# Altium PCB P1_SELF_GD303 V1.1.PcbDoc (part 1 of 2)
Units mm, origin at the board's own origin, x right, y up, seen from the top; angles counter-clockwise.
Board outline 113.1 x 59.11 mm, 2 copper layers (Top layer, Bottom layer), stack 1.171 mm thick; 160 components, 103 nets, 482 pads, 705 vias.
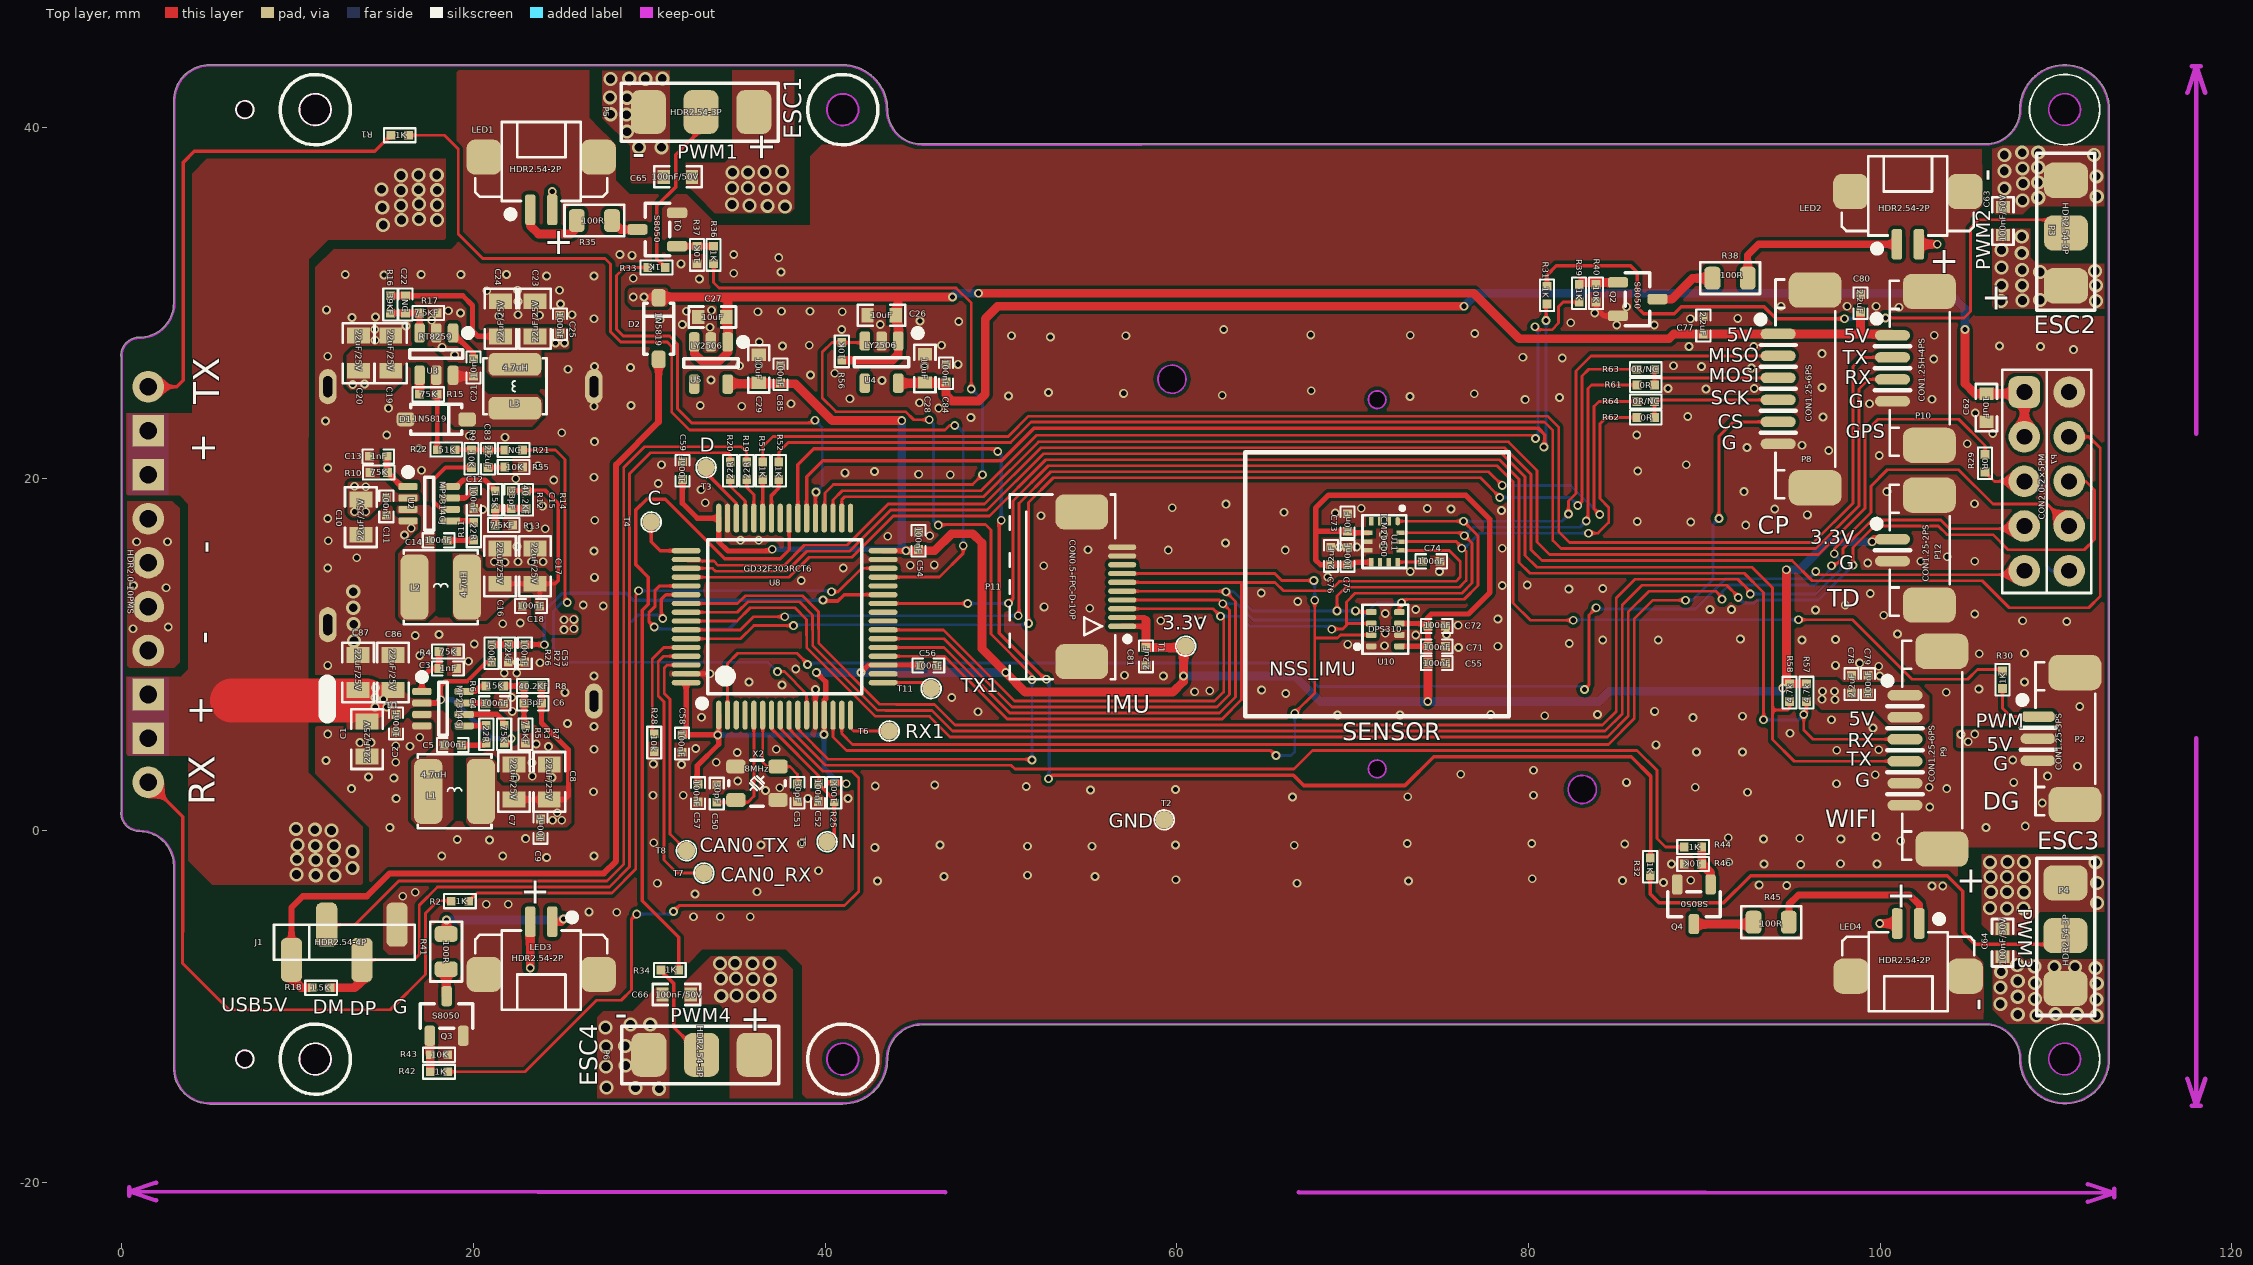
[diagram p0: Top layer view]
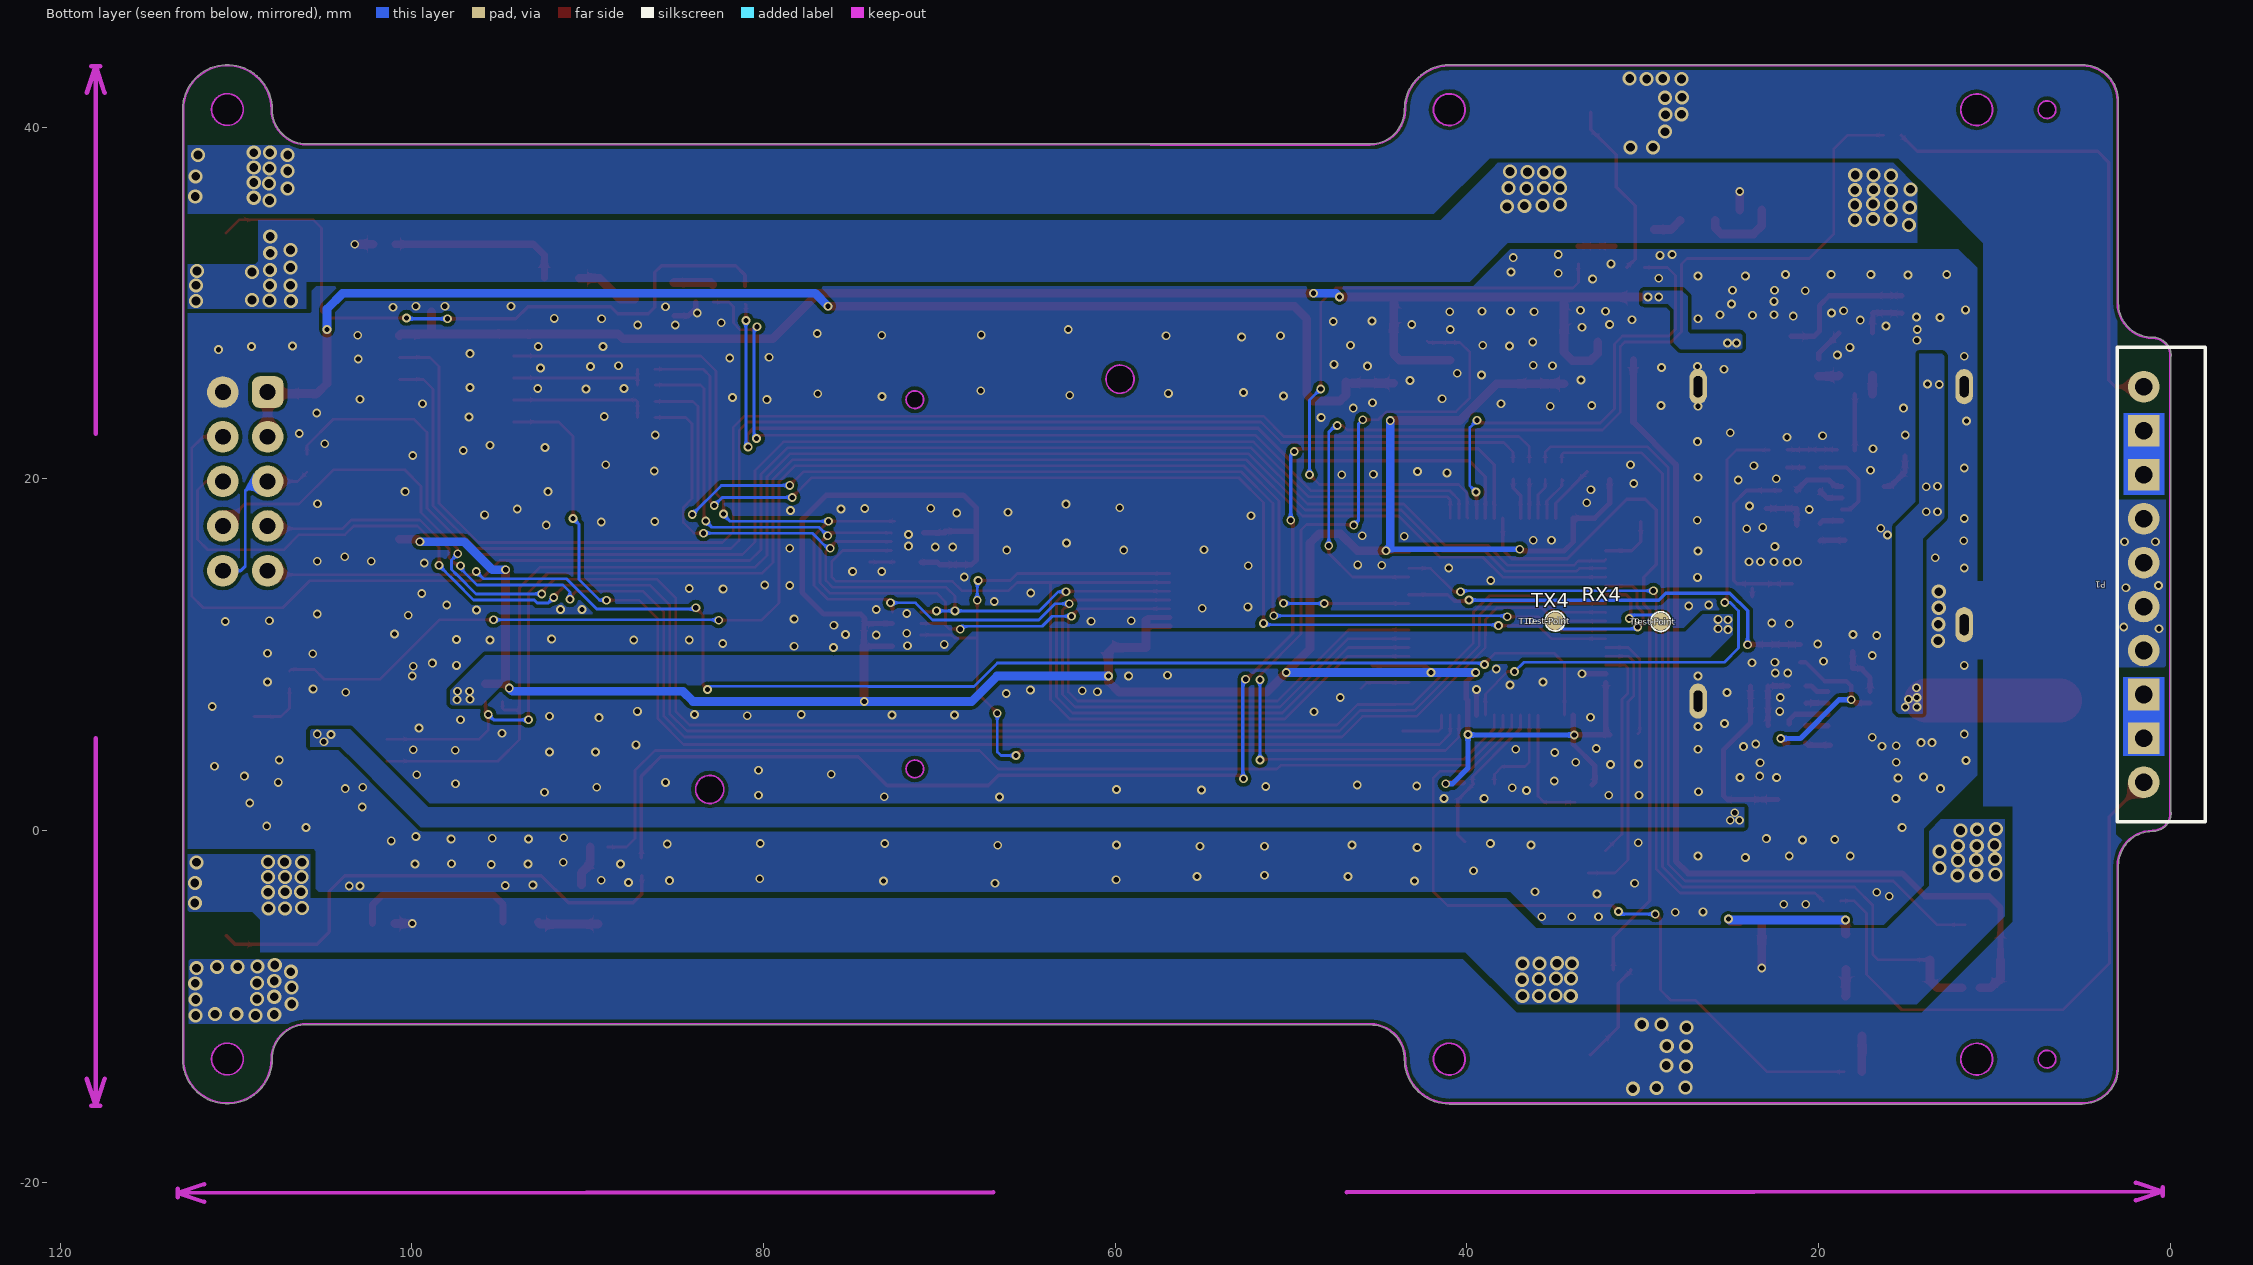
[diagram p1: Bottom layer view, seen from below]

## Layer stack, top to bottom
Top Solder: solder mask 0.0102, Solder Resist, Dk 3.5
Top layer: signal copper 0.0356
Dielectric 1: core 1.1, FR-4, Dk 4.2
Bottom layer: signal copper 0.0356
Bottom Solder: solder mask 0.0102, Solder Resist, Dk 3.5

## Board outline
2.94,-13.491 cw(c2.991,-13.491) 2.95,-13.461 2.95,-2.02 cw(c2.991,-1.991) 2.94,-1.991 ccw(c0.991,-1.991) 2.355,-0.598 ccw(c1,-2) 1,-0.05 cw(c1,1) 0.263,0.252 cw(c0.991,1.009) -0.06,1.009 cw(c-0.009,1.009) -0.05,1.039 -0.05,26.98 cw(c-0.009,27.009) -0.06,27.009 cw(c0.991,27.009) 0.991,28.06 ccw(c0.991,30.009) 2.94,30.009 cw(c2.991,30.009) 2.95,30.039 2.95,41.48 cw(c2.991,41.509) 2.94,41.509 cw(c4.991,41.509) 4.991,43.56 cw(c4.991,43.509) 5.02,43.55 40.961,43.55 cw(c40.991,43.509) 40.991,43.56 cw(c40.991,41.009) 42.774,42.832 cw(c41,41) 43.55,41 ccw(c45.5,41) 45.462,39.051 cw(c45.491,39.009) 45.491,39.06 105.991,39.06 ccw(c105.991,41.009) 107.94,41.009 cw(c107.991,41.009) 107.94,41.009 cw(c110.491,41.009) 113.041,41.009 113.041,-12.991 cw(c110.491,-12.991) 107.94,-12.991 cw(c107.991,-12.991) 107.94,-12.99 cw(c105.991,-12.991) 107.94,-12.991 107.94,-12.99 ccw(c105.991,-12.991) 105.991,-11.041 45.529,-11.041 cw(c45.5,-11) 45.5,-11.05 ccw(c45.5,-13) 43.55,-13 cw(c41,-13) 41,-15.55 5,-15.55 cw(c5,-15.5) 4.999,-15.55 cw(c5,-13.5) 3.565,-14.965 cw(c4.991,-13.491)
cut-out: 59.723,24.876 cw(c59.723,25.676) 58.923,25.676 cw(c59.723,25.676) 59.723,26.476 cw(c59.723,25.676) 60.523,25.676 cw(c59.723,25.676)
cut-out: 70.891,24.509 ccw(c71.391,24.509) 71.391,24.009 ccw(c71.391,24.509) 71.891,24.509 ccw(c71.391,24.509) 71.391,25.009 ccw(c71.391,24.509)
cut-out: 70.891,3.509 ccw(c71.391,3.509) 71.391,3.009 ccw(c71.391,3.509) 71.891,3.509 ccw(c71.391,3.509) 71.391,4.009 ccw(c71.391,3.509)
cut-out: 82.258,2.342 ccw(c83.058,2.342) 83.058,1.542 ccw(c83.058,2.342) 83.858,2.342 ccw(c83.058,2.342) 83.058,3.142 ccw(c83.058,2.342)
cut-out: 109.591,41.009 ccw(c110.491,41.009) 110.491,40.109 ccw(c110.491,41.009) 111.391,41.009 ccw(c110.491,41.009) 110.491,41.909 ccw(c110.491,41.009)
cut-out: 109.591,-12.991 ccw(c110.491,-12.991) 110.491,-13.891 ccw(c110.491,-12.991) 111.391,-12.991 ccw(c110.491,-12.991) 110.491,-12.091 ccw(c110.491,-12.991)
cut-out: 7,40.5 cw(c7,41) 6.5,41 cw(c7,41) 7,41.5 cw(c7,41) 7.5,41 cw(c7,41)
cut-out: 11,40.1 cw(c11,41) 10.1,41 cw(c11,41) 11,41.9 cw(c11,41) 11.9,41 cw(c11,41)
cut-out: 41,40.1 cw(c41,41) 40.1,41 cw(c41,41) 41,41.9 cw(c41,41) 41.9,41 cw(c41,41)
cut-out: 7,-13.5 cw(c7,-13) 6.5,-13 cw(c7,-13) 7,-12.5 cw(c7,-13) 7.5,-13 cw(c7,-13)
cut-out: 11,-13.9 cw(c11,-13) 10.1,-13 cw(c11,-13) 11,-12.1 cw(c11,-13) 11.9,-13 cw(c11,-13)
cut-out: 40.1,-13 ccw(c41,-13) 41,-13.9 ccw(c41,-13) 41.9,-13 ccw(c41,-13) 41,-12.1 ccw(c41,-13)

## Design rules (kind name [scope] priority, off if disabled: settings)
Clearance [InPolygon] p1: gap=0.2
Clearance Clearance_1 [All] p2: gap=0.18
ComponentClearance [All] p1 off: gap=0.254 collisioncheckmode=3 verticalgap=0.254 showdistances=FALSE
DiffPairsRouting [All] p1: maxlimit=0.3 minlimit=0.3 mostfreqgap=0.3 toplayer_minwidth=0.2 toplayer_maxwidth=0.2 toplayer_prefwidth=0.2 bottomlayer_minwidth=0.2 bottomlayer_maxwidth=0.2 bottomlayer_prefwidth=0.2 maxuncoupledlength=12.7
FabricationTestPointUsage FabricationTestPointUsage_1 [All] p1: valid=0 allowmultiple=FALSE
FabricationTestpoint FabricationTestpoint_1 [All] p1: side=3 testpointundercomponent=TRUE minsize=1.016 maxsize=2.54 preferedsize=1.524 minholesize=0 maxholesize=1.016 preferedholesize=0.813 testpointgrid=0.025 allowsidetop=TRUE allowsidebottom=TRUE usegrid=TRUE gridtolerance=0
Height [All] p1 off: minheight=0 maxheight=25.4 prefheight=12.7
HoleSize [All] p1 off: absolutevalues=TRUE maxlimit=2.54 minlimit=0.025 maxpercent=80.000 minpercent=20.000
HoleSize FabricationTestpoint [(IsPad And (OnTopLayer Or OnBottomLayer))] p2 off: absolutevalues=TRUE maxlimit=2.54 minlimit=0.025 maxpercent=80.000 minpercent=20.000
HoleSize FabricationTestPointUsage [All] p3 off: absolutevalues=TRUE maxlimit=2.54 minlimit=0.025 maxpercent=80.000 minpercent=20.000
HoleToHoleClearance [All] p1 off: gap=0.254 allowstackedmicrovias=TRUE
LayerPairs [All] p1 off: enforce=TRUE
MinimumSolderMaskSliver [All] p1 off: minsoldermaskwidth=0.254
MinimumSolderMaskSliver SilkToSolderMaskClearance [IsPad] p2 off: minsoldermaskwidth=0.254
NetAntennae [All] p1 off: netantennaetolerance=0
PasteMaskExpansion [All] p1 off: expansion=0
PlaneClearance [All] p1 off: clearance=0.356
PlaneConnect [All] p1: planeconnectstyle=Direct reliefexpansion=0.5 reliefentries=4 reliefconductorwidth=0.4 reliefairgap=0.4
PolygonConnect [All] p1: connectstyle=Direct reliefconductorwidth=0.254 reliefentries=4 polygonreliefangle="90 Angle" airgapwidth=0.254
RoutingCorners [All] p1 off: cornerstyle=45-Degree minsetback=2.54 maxsetback=2.54
RoutingLayers [All] p1 off: top layer_v5=TRUE bottom layer_v5=TRUE
RoutingPriority [All] p1 off: routingpriority=0
RoutingTopology [All] p1 off: topology=Shortest
RoutingVias "R_All Differential Pairs" [(InDifferentialPairClass('All Differential Pairs'))] p1: holewidth=0.25 width=0.4 viastyle="Through Hole" minholewidth=0.25 minwidth=0.4 maxholewidth=0.25 maxwidth=0.4
RoutingVias R_All [All] p2: holewidth=0.25 width=0.4 viastyle="Through Hole" minholewidth=0.25 minwidth=0.4 maxholewidth=0.25 maxwidth=0.4
SilkToSilkClearance [All] p1 off: silktosilkclearance=0.254
SilkToSolderMaskClearance SilkToSolderMaskClearance_1 [IsPad] p1: minsilkscreentomaskgap=0.254 clearancetoexposedcopper=TRUE
SolderMaskExpansion [All] p1 off: expansion=0.102
Width "W_All Differential Pairs" [(InDifferentialPairClass('All Differential Pairs'))] p1: maxlimit=0.2 minlimit=0.1 preferedwidth=0.2 minimp=50.000000 maximp=50.000000 favimp=50.000000
Width W_All [All] p2: maxlimit=2 minlimit=0.1 preferedwidth=0.16 minimp=50.000000 maximp=50.000000 favimp=50.000000
11 further rules are at their usual default settings.

## Classes and differential pairs
component class "P1-SELF IMU+CP+AIR  V1.1": C71 C72 C73 C74 C75 C76 C77 C78 C79 C80 C81 P8 P9 P10 P11 R51 R52 R57 R58 R61 R62 R63 R64 U10 U11
component class "P1_SELF MCU+2.4G V1.1": C50 C51 C52 C53 C54 C55 C56 C57 C58 C59 C62 C63 C64 C65 C66 LED1 LED2 LED3 LED4 P2 P3 P4 P5 P6 P7 Q1 Q2 Q3 Q4 R25 R26 R27 R28 R29 R30 R31 R32 R33 R34 R35 R36 R37 R38 R39 R40 R41 R42 R43 R44 R45 R46 T1 T2 T3 T4 T5 T6 T7 T8 T9 T10 T11 U8 X2
component class "P1_SELF POWER  V1.1": C1 C2 C3 C4 C5 C6 C7 C8 C9 C10 C11 C12 C13 C14 C15 C16 C17 C18 C19 C20 C21 C22 C23 C24 C25 C26 C27 C28 C29 C83 C84 C85 C86 C87 D1 D2 J1 L1 L2 L3 P1 P12 R1 R2 R3 R4 R5 R6 R7 R8 R9 R10 R11 R12 R13 R14 R15 R16 R17 R18 R19 R20 R21 R22 R55 R56 U1 U2 U3 U4 U5

## Components (designator, comment, footprint, x,y, rotation, side; value= is the part's Value field where it differs from the comment)
C1 "22uF/25V" C-0805 13.945,5.207 r270 top
C2 "100nF" C-0402 15.596,6.096 r270 top
C3 "1nF" C-0402 18.542,9.22 r180 top
C4 "100nF" C-0402 21.209,7.239 r180 top
C5 "100nF" C-0402 18.821,4.877 r0 top
C6 "33pF" C-0402 23.368,7.239 r180 top
C7 "22uF/25V" C-0805 22.301,2.769 r90 top
C8 "22uF/25V" C-0805 24.308,2.769 r90 top
C9 "100nF" C-0402 23.8,0.152 r270 top
C10 "22uF/25V" C-0805 13.589,17.831 r270 top
C11 "100nF" C-0402 15.037,18.44 r270 top
C12 "100nF" C-0402 20.015,18.821 r90 top
C13 "1nF" C-0402 14.58,21.285 r0 top
C14 "100nF" C-0402 18.009,16.51 r0 top
C15 "33pF" C-0402 22.149,18.821 r270 top
C16 "22uF/25V" C-0805 21.514,15.037 r90 top
C17 "22uF/25V" C-0805 23.495,15.037 r90 top
C18 "100nF" C-0402 23.266,12.776 r180 top
C19 "22uF/25V" C-0805 15.291,27.153 r90 top
C20 "22uF/25V" C-0805 13.462,27.153 r90 top
C21 "10nF" C-0402 19.99,26.34 r270 top
C22 "NC" C-0402 16.129,29.921 r90 top
C23 "22uF/25V" C-0805 23.495,29.108 r90 top
C24 "22uF/25V" C-0805 21.539,29.108 r270 top
C25 "100nF" C-0402 24.917,28.804 r90 top
C26 "10uF" C-0603 43.205,29.312 r180 top
C27 "10uF" C-0603 33.579,29.21 r180 top
C28 "10uF" C-0603 45.669,26.289 r90 top
C29 "10uF" C-0603 36.22,26.264 r90 top
C50 "30pF" C-0402 33.833,2.108 r90 top
C51 "30pF" C-0402 38.43,2.159 r270 top
C52 "100nF" C-0402 39.599,2.159 r270 top
C53 "100nF" C-0402 22.911,10.084 r270 top
C54 "100nF" C-0402 45.314,16.485 r90 top
C55 "100nF" C-0402 74.778,9.525 r0 top
C56 "100nF" C-0402 45.872,9.398 r0 top
C57 "100nF" C-0402 32.766,2.134 r270 top
C58 "100nF" C-0402 31.852,4.953 r270 top
C59 "100nF" C-0402 31.877,20.472 r90 top
C62 "10uF" C-0603 106.045,24.054 r270 top
C63 "100nF/50V" C-0603 106.985,34.671 r90 top
C64 "100nF/50V" C-0603 106.959,-6.375 r270 top
C65 "100nF/50V" C-0603 31.623,37.186 r180 top
C66 "100nF/50V" C-0603 31.547,-9.322 r180 top
C71 "100nF" C-0402 74.778,10.465 r0 top
C72 "100nF" C-0402 74.778,11.633 r180 top
C73 "10nF" C-0402 69.698,17.526 r270 top
C74 "100nF" C-0402 74.473,15.316 r180 top
C75 "100nF" C-0402 69.698,15.621 r270 top
C76 "2.2uF" C-0402 68.758,15.621 r270 top
C77 "2.2uF" C-0402 89.941,28.727 r90 top
C78 "2.2uF" C-0402 98.374,8.331 r270 top
C79 "100nF" C-0402 99.314,8.331 r270 top
C80 "2.2uF" C-0402 98.882,29.997 r270 top
C81 "2.2uF" C-0402 58.242,9.906 r270 top
C83 "2.2uF" C-0402 20.828,21.15 r270 top
C84 "100nF" C-0402 46.863,26.01 r90 top
C85 "100nF" C-0402 37.465,25.959 r90 top
C86 "22uF/25V" C-0805 15.418,8.992 r90 top
C87 "22uF/25V" C-0805 13.437,8.992 r90 top
D1 "1N5819" SOD-123 17.882,23.393 r0 top
D2 "1N5819" SOD-123 30.531,28.55 r90 top (schematic designator Z3)
J1 "HDR2.54-4P" HDR2.0-4PS 12.649,-6.35 r0 top
L1 "4.7uH" L-404018 18.923,2.235 r0 top
L2 "4.7uH" L-404018 18.136,13.843 r0 top
L3 "4.7uH" L-303015 22.352,25.273 r90 top
LED1 "HDR2.54-2P" CON1.25H-2PS 23.851,36.805 r0 top
LED2 "HDR2.54-2P" CON1.25H-2PS 101.575,34.849 r0 top locked
LED3 "HDR2.54-2P" CON1.25H-2PS 23.851,-6.68 r180 top
LED4 "HDR2.54-2P" CON1.25H-2PS 101.6,-6.782 r180 top locked
P1 "HDR2.0-10PMS" BAT_CON10PIN 1.499,2.743 r90 bottom
P2 "CON1.25-3PS" CON1.25-3PS 110.033,5.232 r270 top locked
P3 "HDR2.54-3P" DT_3PIN 110.566,30.988 r90 top locked
P4 "HDR2.54-3P" DT_3PIN 110.541,-2.972 r270 top locked
P5 "HDR2.54-3P" DT_3PIN 35.941,40.869 r180 top
P6 "HDR2.54-3P" DT_3PIN 35.966,-12.751 r180 top
P7 "CON2.0-2×5PM" HDR2.54-5X2P 109.474,19.863 r270 top locked
P8 "CON1.25-6PS" CON1.25-6PS 95.25,25.121 r270 top
P9 "CON1.25-6PS" CON1.25-6PS 102.464,4.572 r270 top locked
P10 "CON1.25H-4PS" CON1.25-4PS 101.752,26.289 r270 top locked
P11 "CON0.5-FPC-D-10P" CON0.5-FPC-10P 55.741,13.868 r90 top locked
P12 "CON1.25-2PS" CON1.25-2PS 101.752,15.951 r270 top locked
Q1 "S8050" SOT-23 30.455,34.188 r90 top
Q2 "S8050" SOT-23 86.208,30.226 r270 top
Q3 "S8050" SOT-23 18.466,-10.541 r0 top
Q4 "S8050" SOT-23 89.408,-4.191 r180 top
R1 "1K" R-0402#1 15.799,39.548 r0 top
R2 "1K" R-0402#1 19.228,-4.013 r0 top
R3 "75K" R-0402#1 21.742,5.486 r270 top
R4 "75K" R-0402#1 18.542,10.185 r180 top
R5 "22R" R-0402#1 20.726,5.486 r270 top
R6 "15K" R-0402#1 21.201,8.23 r0 top
R7 "7.5KF" R-0402#1 22.962,5.486 r90 top
R8 "40.2KF" R-0402#1 23.368,8.23 r0 top
R9 "10K" R-0402#1 19.888,21.15 r90 top
R10 "75K" R-0402#1 14.605,20.371 r0 top
R11 "22R" R-0402#1 20.015,17.018 r270 top
R12 "15K" R-0402#1 21.234,18.821 r270 top
R13 "7.5KF" R-0402#1 21.717,17.374 r180 top
R14 "40.2KF" R-0402#1 22.987,18.821 r90 top
R15 "75K" R-0402#1 17.424,24.816 r0 top
R16 "39KF" R-0402#1 15.265,29.921 r90 top
R17 "7.5KF" R-0402#1 17.424,29.439 r180 top
R18 "1.5K" R-0402#1 11.328,-8.941 r0 top
R19 "22R" R-0402#1 35.535,20.472 r90 top
R20 "22R" R-0402#1 34.595,20.472 r90 top
R21 "NC" R-0402#1 22.276,21.641 r0 top
R22 "51K" R-0402#1 18.44,21.666 r0 top
R25 "100k" R-0402#2 40.513,2.159 r270 top
R26 "100kF" R-0402#1 21.031,10.084 r270 top
R27 "22kF" R-0402#1 21.971,10.084 r90 top
R28 "10k" R-0402#1 30.277,5.004 r90 top
R29 "0R" R-0402#1 105.969,20.896 r270 top
R30 "1K" R-0402#1 106.959,8.585 r270 top
R31 "1K" R-0402#1 81.051,30.455 r90 top
R32 "1K" R-0402#1 86.919,-2.057 r270 top
R33 "1K" R-0402#1 30.404,32.029 r0 top
R34 "1K" R-0402#1 31.166,-7.925 r180 top
R35 "100R" R-0805 26.873,34.696 r180 top
R36 "1K" R-0402#1 33.655,32.741 r90 top
R37 "10K" R-0402#1 32.715,32.741 r90 top
R38 "100R" R-0805 91.465,31.42 r0 top
R39 "1K" R-0402#1 82.88,30.556 r90 top
R40 "10K" R-0402#1 83.845,30.556 r90 top
R41 "100R" R-0805 18.44,-6.883 r90 top
R42 "1K" R-0402#1 18.034,-13.716 r180 top
R43 "10K" R-0402#1 18.034,-12.751 r180 top
R44 "1K" R-0402#1 89.357,-0.94 r0 top
R45 "100R" R-0805 93.802,-5.207 r0 top
R46 "10K" R-0402#1 89.357,-1.905 r0 top
R51 "1K" R-0402#1 36.449,20.472 r90 top
R52 "1K" R-0402#1 37.363,20.472 r90 top
R55 "10K" R-0402#1 22.276,20.676 r0 top
R56 "10K" R-0402#1 40.945,27.254 r270 top
R57 "4.7k" R-0402#1 95.809,7.849 r90 top
R58 "4.7k" R-0402#1 94.844,7.849 r90 top
R61 "0R" R-0402#1 86.665,25.349 r180 top
R62 "0R" R-0402#1 86.665,23.495 r180 top
R63 "0R/NC" R-0402#1 86.665,26.238 r180 top
R64 "0R/NC" R-0402#1 86.665,24.409 r180 top
T1 "Test-Point" Test-Point 60.503,10.49 r90 top
T2 "Test-Point" Test-Point 59.284,0.61 r270 top
T3 "Test-Point" Test-Point 33.223,20.65 r90 top
T4 "Test-Point" Test-Point 30.099,17.551 r90 top
T5 "Test-Point" Test-Point 40.107,-0.635 r90 top
T6 "Test-Point" Test-Point 43.637,5.664 r0 top
T7 "Test-Point" Test-Point 33.096,-2.413 r0 top
T8 "Test-Point" Test-Point 32.106,-1.143 r0 top
T9 "Test-Point" Test-Point 28.981,11.887 r180 bottom
T10 "Test-Point" Test-Point 34.98,11.917 r90 bottom
T11 "Test-Point" Test-Point 46.025,8.077 r90 top
U1 "MP2314GJ" TSOT23-8 18.263,6.934 r0 top
U2 "MP2314GJ" TSOT23-8 17.475,18.593 r0 top
U3 "RT8259" SOT23-6 17.882,27.102 r270 top
U4 "LY2506" SOT23-5 43.205,26.645 r270 top
U5 "LY2506" SOT23-5 33.503,26.594 r270 top
U8 "GD32F303RCT6" LQFP-64 37.694,12.167 r90 top locked
U10 "DPS310" LGA-8 71.857,11.455 r180 top locked
U11 "ICM20600" LLGA14 71.806,16.434 r270 top
X2 "8MHz" XTAL-3.2X2.5-SM 36.119,2.692 r180 top

## Footprints (in the part's own frame and the unit in brackets; to place one, negate y for a bottom-side part, rotate by r counter-clockwise, add the part's x,y. Pads: shape width x height; smd on the part's side, far side on the other; paste and mask are expansions set on the pad)
BAT_CON10PIN [mm]
  round 1.8 hole 1: 1(0,0) 4(7.5,0) 5(10,0) 6(12.5,0) 7(15,0) 10(22.5,0)
  rect 1.8x1.8 hole 1: 2(2.5,0) 3(5,0) 8(17.5,0) 9(20,0)
  silkscreen extent -2.25,-3.5 24.75,1.5
C-0402 [mm]
  rect 0.5x0.5 smd mask+0.05: 1(-0.5,0) 2(0.5,0)
  silkscreen extent -0.9,-0.4 0.9,0.4, body extent -0.5,-0.25 0.5,0.25, height 0.5
C-0603 [mm]
  rect 0.7x0.8 smd mask+0.05: 1(-0.8,0) 2(0.8,0)
  silkscreen extent -1.35,-0.6 1.35,0.6, body extent -0.8,-0.4 0.8,0.4, height 0.7
C-0805 [mm]
  rect 0.9x1.3 smd mask+0.05: 1(-1,0) 2(1,0)
  silkscreen extent -1.7,-0.9 1.7,0.9, body extent -0.99,-0.61 1.01,0.59, height 1.2
CON0.5-FPC-10P [mm]
  rrect50% 2x3 smd mask+0.05: 0(-4.256,1.15) 0(4.256,1.15)
  oval 0.3x1.6 smd mask+0.05: 1(-2.25,-1.15) 2(-1.75,-1.15) 3(-1.25,-1.15) 4(-0.75,-1.15) 5(-0.25,-1.15) 6(0.25,-1.15) 7(0.75,-1.15) 8(1.25,-1.15) 9(1.75,-1.15) 10(2.25,-1.15)
  silkscreen extent -5.25,-1.6 5.25,5.25, body extent -5.25,-0.75 5.25,4.3, height 2.05
CON1.25-2PS [mm]
  rrect50% 2x3 smd mask+0.05: 0(-3.125,1.05) 0(3.125,1.05)
  oval 0.6x2 smd mask+0.05: 1(-0.625,-1.05) 2(0.625,-1.05)
  silkscreen extent -3.72,-2.15 3.73,2.2, body extent -3.72,-1.2 3.73,2.2, height 4.8
CON1.25-3PS [mm]
  rrect50% 2x3 smd mask+0.05: 0(-3.75,1.05) 0(3.75,1.05)
  oval 0.6x2 smd mask+0.05: 1(-1.25,-1.05) 2(0,-1.05) 3(1.25,-1.05)
  silkscreen extent -4.35,-2.15 4.35,2.2, body extent -4.35,-1.2 4.35,2.2, height 4.8
CON1.25-4PS [mm]
  rrect50% 2x3 smd mask+0.05: 0(-4.375,1.05) 0(4.375,1.05)
  oval 0.6x2 smd mask+0.05: 1(-1.875,-1.05) 2(-0.625,-1.05) 3(0.625,-1.05) 4(1.875,-1.05)
  silkscreen extent -4.97,-2.15 4.98,2.2, body extent -4.97,-1.2 4.98,2.2, height 4.8
CON1.25-6PS [mm]
  rrect50% 2x3 smd mask+0.05: 0(-5.625,1.05) 0(5.625,1.05)
  oval 0.6x2 smd mask+0.05: 1(-3.125,-1.05) 2(-1.875,-1.05) 3(-0.625,-1.05) 4(0.625,-1.05) 5(1.875,-1.05) 6(3.125,-1.05)
  silkscreen extent -6.22,-2.25 6.23,2.2, body extent -6.22,-1.2 6.23,2.2, height 4.8
CON1.25H-2PS [mm]
  rrect50% 2x2 smd mask+0.05: 0(-3.25,1.5) 0(3.25,1.5)
  rrect50% 0.6x1.75 smd mask+0.05: 1(-0.625,-1.5) 2(0.625,-1.5)
  silkscreen extent -3.75,-1.95 3.75,3.5, body extent -3.75,-1.9 3.75,3.5, height 3.6
DT_3PIN [mm]
  rrect50% 2x2.5 smd mask+0.05: 1(0,0) 2(3,0) 3(6,0)
  silkscreen extent -1.4,-1.63 7.54,1.65, body extent -0.76,-1.15 6.75,1.17, height 0.5
HDR2.0-4PS [mm]
  rrect50% 1.2x2.5 smd mask+0.05: 1(-3,-1) 2(-1,1) 3(1,-1) 4(3,1)
  silkscreen extent -4,-1 4,1, body extent -4,-2 4,2, height 6.7
HDR2.54-5X2P [mm]
  rrect50% 1.8x1.8 hole 0.9 mask+0.05: 1(-5.08,-1.27)
  round 1.8 hole 0.9 mask+0.05: 2(-5.08,1.27) 3(-2.54,-1.27) 4(-2.54,1.27) 5(0,-1.27) 6(0,1.27) 7(2.54,-1.27) 8(2.54,1.27) 9(5.08,-1.27) 10(5.08,1.27)
  silkscreen extent -6.35,-2.54 6.35,2.54, body extent -6.35,-2.54 6.35,2.54, height 8.7
L-303015 [mm]
  rrect50% 1.3x3 smd mask+0.05: 1(-1.25,0) 2(1.25,0)
  silkscreen extent -1.6,-1.8 1.6,1.8, body extent -1.5,-1.5 1.5,1.5, height 1.5
L-404018 [mm]
  rrect50% 1.6x3.7 smd mask+0.05: 1(-1.5,0) 2(1.5,0)
  silkscreen extent -2.1,-2.1 2.1,2.1, body extent -2,-2 2,2, height 1.9
LGA-8 [mm] "FOR 2SMPB-02 AND BMP280"
  rrect50% 0.6x0.35 smd mask+0.05: 1(0.8,0.975) 2(0.8,0.325) 3(0.8,-0.325) 4(0.8,-0.975) 5(-0.8,-0.975) 6(-0.8,-0.325) 7(-0.8,0.325) 8(-0.8,0.975)
  silkscreen extent -1.3,-1.4 1.7,1.4, body extent -1,-1.27 1,1.28, height 0.95
LLGA14 [mm]
  oval 0.475x0.25 smd: 1(-1.162,0.75)
  rect 0.475x0.25 smd: 2(-1.162,0.25) 3(-1.162,-0.25) 4(-1.162,-0.75) 8(1.163,-0.75) 9(1.163,-0.25) 10(1.163,0.25) 11(1.163,0.75)
  rect 0.25x0.475 smd: 5(-0.5,-0.913) 6(0,-0.913) 7(0.5,-0.913) 12(0.5,0.913) 13(0,0.913) 14(-0.5,0.913)
  silkscreen extent -2,-1.25 1.5,1.25, body extent -1.5,-1.29 1.5,1.29, height 0.9
LQFP-64 [mm] "TSQFP, 64-Leads, Body 10.00x10.00mm, Pitch 0.50mm, IPC Medium Density"
  oval 1.65x0.3 smd mask+0.05: 1(-5.6,3.75) 2(-5.6,3.25) 3(-5.6,2.75) 4(-5.6,2.25) 5(-5.6,1.75) 6(-5.6,1.25) 7(-5.6,0.75) 8(-5.6,0.25) 9(-5.6,-0.25) 10(-5.6,-0.75) 11(-5.6,-1.25) 12(-5.6,-1.75) 13(-5.6,-2.25) 14(-5.6,-2.75) 15(-5.6,-3.25) 16(-5.6,-3.75) 33(5.6,-3.75) 34(5.6,-3.25) 35(5.6,-2.75) 36(5.6,-2.25) 37(5.6,-1.75) 38(5.6,-1.25) 39(5.6,-0.75) 40(5.6,-0.25) 41(5.6,0.25) 42(5.6,0.75) 43(5.6,1.25) 44(5.6,1.75) 45(5.6,2.25) 46(5.6,2.75) 47(5.6,3.25) 48(5.6,3.75)
  oval 0.3x1.65 smd mask+0.05: 17(-3.75,-5.6) 18(-3.25,-5.6) 19(-2.75,-5.6) 20(-2.25,-5.6) 21(-1.75,-5.6) 22(-1.25,-5.6) 23(-0.75,-5.6) 24(-0.25,-5.6) 25(0.25,-5.6) 26(0.75,-5.6) 27(1.25,-5.6) 28(1.75,-5.6) 29(2.25,-5.6) 30(2.75,-5.6) 31(3.25,-5.6) 32(3.75,-5.6) 49(3.75,5.6) 50(3.25,5.6) 51(2.75,5.6) 52(2.25,5.6) 53(1.75,5.6) 54(1.25,5.6) 55(0.75,5.6) 56(0.25,5.6) 57(-0.25,5.6) 58(-0.75,5.6) 59(-1.25,5.6) 60(-1.75,5.6) 61(-2.25,5.6) 62(-2.75,5.6) 63(-3.25,5.6) 64(-3.75,5.6)
  silkscreen extent -5.13,-4.38 4.38,4.9, body extent -5,-5 5,5, height 1.6
R-0402#1 [mm]
  rect 0.5x0.5 smd mask+0.05: 1(-0.5,0) 2(0.5,0)
  silkscreen extent -0.9,-0.4 0.9,0.4, body extent -0.5,-0.25 0.5,0.25, height 0.5
R-0402#2 [mm]
  rect 0.4x0.5 smd mask+0.05: 1(-0.56,0) 2(0.56,0)
  silkscreen extent -0.9,-0.4 0.9,0.4, body extent -0.5,-0.25 0.5,0.25, height 0.5
R-0805 [mm] "Chip R"
  rrect50% 0.9x1.3 smd mask+0.05: 1(-1,0) 2(1,0)
  silkscreen extent -1.7,-0.9 1.7,0.9, body extent -1,-0.6 1,0.6, height 0.5
SOD-123 [mm]
  rrect50% 1x0.8 smd mask+0.05: 1(-1.75,0) 2(1.75,0)
  silkscreen extent -1.45,-0.85 1.45,0.85, body extent -2,-0.8 2,0.8, height 1.1
SOT23-5 [mm]
  rrect50% 1.1x0.6 smd mask+0.05: 1(-1.2,0.95) 2(-1.2,0) 3(-1.2,-0.95) 4(1.2,-0.95) 5(1.2,0.95)
  silkscreen extent -1.85,-1.55 0.25,2.26, body extent -1.5,-1.55 1.5,1.55, height 1.45
SOT23-6 [mm] "SOT23, 6-Leads, Body 3.0x3.0mm (max), Pitch 0.95mm, IPC Medium Density"
  rrect50% 1.1x0.6 smd mask+0.05: 1(-1.2,0.95) 2(-1.2,0) 3(-1.2,-0.95) 4(1.2,-0.95) 5(1.2,0) 6(1.2,0.95)
  silkscreen extent -1.4,-1.5 0.25,2, body extent -1.5,-1.5 1.5,1.5, height 1.1
SOT-23 [mm]
  rrect50% 0.6x1.15 smd mask+0.05: 1(-0.95,-1.125) 2(0.95,-1.125) 3(0,1.125)
  silkscreen extent -1.5,-0.7 1.5,0.7, body extent -1.5,-1.4 1.5,1.4, height 1
Test-Point [mm]
  round 1 smd paste-2 mask+0.05: 0(0,0)
  silkscreen extent -0.56,-0.56 0.56,0.56
TSOT23-8 [mm] "SOT23, 6-Leads, Body 3.0x3.0mm (max), Pitch 0.95mm, IPC Medium Density"
  rrect50% 1.1x0.4 smd mask+0.05: 1(-1.2,0.975) 2(-1.2,0.325) 3(-1.2,-0.325) 4(-1.2,-0.975) 5(1.2,-0.975) 6(1.2,-0.325) 7(1.2,0.325) 8(1.2,0.975)
  silkscreen extent -1.4,-1.5 0.25,2, body extent -1.53,-1.5 1.53,1.5, height 1
XTAL-3.2X2.5-SM [mm] "3.2×2.5×0.7"
  rrect50% 1.1x0.8 smd mask+0.05: 1(-1.2,-0.95) 2(1.2,-0.95) 3(1.2,0.95) 4(-1.2,0.95)
  silkscreen extent -1.6,-1.3 1.6,1.3, body extent -1.6,-1.25 1.6,1.25, height 0.7

## Part data
C1 C7 C8 C10 C16 C17 C86 C87: library part "Cap Pol1", "Polarized Capacitor (Radial)"
C2 C3 C4 C5 C6 C9 C11 C12 C13 C14 C15 C18 C21 C22 C25 C83 C84 C85: library part Cap, "Capacitor"
C19 C20 C23 C24 C26 C27 C28 C29 C52 C53 C54 C55 C56 C57 C58 C59 C62 C63 C64 C65 C66 C71 C72 C73 C74 C75 C76 C77 C78 C79 C80 C81: library part CAP, "Capacitor"
C50 C51: library part CAP
D1: library part Diode
D2: library part TVS_0
L1 L2 L3: library part Inductor
Q1 Q2 Q3 Q4: library part NPN[SOT-23], "EBC"
R1 R2 R3 R4 R5 R6 R7 R8 R9 R10 R11 R12 R13 R14 R15 R16 R17 R18 R19 R20 R21 R22 R25 R26 R27 R28 R29 R30 R31 R32 R33 R34 R35 R36 R37 R38 R39 R40 R41 R42 R43 R44 R45 R46 R51 R52 R55 R56 R57 R58 R61 R62 R63 R64: library part Res, "Resistor"
U3: library part RT8259GE
U10: library part 2SMPB-02, "Digital pressure sensor “ BMP280”or “2SMPB-02”"
X2: library part XTAL-4P

## Free pads (board coordinates)
  oval 1x2 hole 0.5 slot 1.2 at 90 deg: 0(26.848,7.366) 0(26.848,25.248) 1(11.709,11.709) 2(11.709,25.248)

## Via types
v1: diameter 0.5, hole 0.3, Top layer to Bottom layer, tented both sides, 565 vias
v2: diameter 0.8, hole 0.5, Top layer to Bottom layer, tented both sides, 140 vias

## Nets (pads, with @x,y where several pads share a name; then routed paths per layer and width w, separated by ;. In a path a pad name is that pad's centre, name@x,y a point inside that pad or via, vN(x,y) a via of type N, cw(c..) or ccw(c..) an arc to the next point about the centre after c; other vN are vias at no path point)
2.4G_CSN: P7.4 U8.50 | length 100.3
  Top layer w0.16: U8.50@32.094,15.417 32.184,15.327 33.668,15.327 33.907,15.088 37.668,15.088 38.811,16.231 41.25,16.231 43.586,18.567 49.06,18.567 52.264,21.772 78.634,21.772 80.141,20.265 80.141,15.977 80.76,15.357 94.996,15.357 96.141,14.212 105.803,14.212 107.34,12.675 111.862,12.675 112.522,13.335 112.522,21.742 111.862,22.403 P7.4@110.744,22.403
2.4G_MISO: P7.6 U8.56 | length 100.1
  Top layer w0.15: 39.284,11.405 39.284,10.531 42.976,6.839 43.434,6.839
  Top layer w0.16: U8.56@32.094,12.407 U8.56@32.094,12.417 34.999,12.417 35.599,13.017 38.536,13.017 39.284,12.268 39.284,11.405 ; 43.434,6.839 46.071,6.839 47.244,5.666 84.353,5.666 85.328,6.641 85.328,12.837 86.446,13.954 88.571,13.954 88.573,13.956 91.276,13.956 v1@91.923,13.31 ; v1(98.45,15.088) 98.45,16.104 99.67,17.323 103.302,17.323 103.794,16.83 106.41,16.83 107.264,15.977 111.608,15.977 112.182,16.551 112.182,19.38 111.699,19.863 P7.6@110.744,19.863 P7.6@110.744,19.279
  Bottom layer w0.16: v1(91.923,13.259) 92.229,12.952 92.87,12.952 93.04,13.122 96.485,13.122 97.575,14.212 97.583,14.212 98.081,14.71 98.081,14.718 v1(98.45,15.088)
2.4G_MOSI: P7.7 U8.57 | length 90.3
  Top layer w0.15: 38.944,11.1 38.944,10.404 42.849,6.499 43.561,6.499
  Top layer w0.16: U8.57@32.094,11.917 34.98,11.917 35.74,12.677 38.276,12.677 38.944,12.008 38.944,11.1 ; 43.561,6.499 45.93,6.499 47.103,5.326 84.494,5.326 85.668,6.5 85.668,12.44 86.843,13.614 88.712,13.614 88.714,13.616 90.67,13.616 91.008,13.278 v1(91.008,13.157) ; v1(97.231,15.062) 97.419,15.062 97.894,15.537 97.894,16.028 99.529,17.663 103.443,17.663 103.935,17.17 108.052,17.17 P7.7@108.204,17.323
  Bottom layer w0.16: v1(91.008,13.157) 91.008,13.574 91.407,13.972 92.82,13.972 92.822,13.97 96.301,13.97 97.231,14.9 v1(97.231,15.062)
2.4G_POWER_CE: R56.1 U4.3 U8.10 | length 50.2
  Top layer w0.16: U8.10@38.444,6.567 38.444,5.774 40.16,4.058 51.72,4.058 v1(51.765,4.013) ; U4.3@42.255,27.845 42.165,27.754 R56.1@40.945,27.754 40.378,27.754 39.827,27.203 39.827,24.619 40.619,23.827 44.575,23.827 45.034,23.368 v1(45.923,23.368) ; v1(46.431,17.374) 46.459,17.401 49.122,17.401 49.428,17.094 49.428,11.176 51.765,8.839 v1(51.765,8.585)
  Bottom layer w0.16: v1(45.923,23.368) 46.152,23.139 46.152,17.653 v1(46.431,17.374) ; v1(51.765,8.585) v1(51.765,4.013) v1@51.841,3.937
2.4G_SCK: P7.8 U8.55 | length 96.9
  Top layer w0.15: 39.624,11.481 39.624,10.657 43.102,7.179 44.044,7.179
  Top layer w0.16: U8.55@32.094,12.917 35.018,12.917 35.458,13.357 38.713,13.357 39.624,12.446 39.624,11.481 ; 44.044,7.179 46.212,7.179 47.385,6.006 84.213,6.006 84.988,6.782 84.988,13.233 86.049,14.294 88.43,14.294 88.432,14.296 91.901,14.296 92.608,13.589 v1(92.608,13.462) ; v1(97.384,15.748) 97.384,15.998 99.47,18.085 99.47,19.587 100.406,20.523 104.455,20.523 106.411,18.567 109.499,18.567 P7.8@110.744,17.323
  Bottom layer w0.16: v1(92.608,13.462) 96.344,13.462 97.434,14.552 97.442,14.552 97.741,14.851 97.741,15.39 v1(97.384,15.748)
3V3_2.4G: C28.1 C62.1 C84.1 P7.1 P7.3 U4.5 | length 77.2
  Top layer w0.5: U4.5@44.155,25.445 C84.1@46.798,25.445 ; C84.1@46.863,25.51 46.863,24.791 47.213,24.441 48.723,24.441 49.098,24.816 49.098,29.114 49.804,29.82 v1(76.327,29.82) ; v1(104.826,28.499) 104.826,25.425 105.397,24.854 C62.1@106.045,24.854 P7.1@108.115,24.854 ; P7.3@108.204,22.403 P7.1@108.204,24.943
  Bottom layer w0.5: v1(76.327,29.82) 77.064,30.556 103.937,30.556 104.826,29.667 v1(104.826,28.499)
ADC_BAT: C53.1 R26.1 R27.2 U8.27 | length 25
  Top layer w0.2: v1(39.878,13.11) 39.929,13.059 40.721,13.059 41.078,13.417 U8.27@43.294,13.417
  Top layer w0.3: R26.1@21.031,10.584 R27.2@21.971,10.584 C53.1@22.911,10.584 24.011,10.584 v1(24.028,10.566)
  Bottom layer w0.2: v1(24.028,10.566) 24.028,12.498 25.04,13.509 28.68,13.509 29.08,13.11 v1(39.878,13.11)
CAN0_RX: T7.0 U8.61 | length 15.7
  Top layer w0.16: U8.61@32.094,9.917 30.795,9.917 30.505,9.627 30.505,7.647 30.826,7.327 30.826,-1.667 31.572,-2.413 T7.0@33.096,-2.413
CAN0_TX: T8.0 U8.62 | length 12.2
  Top layer w0.16: U8.62@32.094,9.417 31.007,9.417 30.845,9.255 30.845,7.788 31.166,7.468 31.166,-0.203 T8.0@32.106,-1.143
CP_SCL: R64.2 U8.58 | length 69.2
  Top layer w0.16: U8.58@32.094,11.417 35.166,11.417 35.916,12.167 v1(37.694,12.167) ; v1(50.978,12.217) 51.029,12.269 51.029,18.614 52.827,20.412 77.734,20.412 v1(78.511,19.634) ; v1(84.049,17.983) 83.722,18.309 83.722,24.13 84.002,24.409 R64.2@86.165,24.409
  Bottom layer w0.16: v1(37.694,12.167) 37.744,12.217 v1(50.978,12.217) ; v1(78.511,19.634) 82.398,19.634 v1(84.049,17.983)
CP_SDA: R63.2 U8.59 | length 69.9
  Top layer w0.16: U8.59@32.094,10.917 35.199,10.917 35.941,11.659 37.48,11.659 37.482,11.657 38.2,11.657 v1(38.202,11.659) ; v1(51.562,11.786) 51.562,18.666 52.968,20.072 77.261,20.072 78.359,18.974 v1(78.359,18.948) ; v1(82.804,18.491) 83.042,18.73 83.042,25.857 83.423,26.238 R63.2@86.165,26.238
  Bottom layer w0.16: v1(38.202,11.659) 38.25,11.707 51.484,11.707 v1(51.562,11.786) ; v1(78.359,18.948) 82.347,18.948 v1(82.804,18.491)
DG_5V: C6.1 C7.1 C8.1 C9.1 L1.2 P2.2 R8.2 | length 10.1
  Top layer w0.3: C7.1@22.301,1.769 C8.1@24.308,1.769 25.187,1.769 25.4,1.981 25.4,4.597 23.868,6.129 R8.2@23.868,8.23
  other v1: 24.486,0.584 25.019,0.584 24.765,1.016 105.004,5.055 104.597,5.461 105.385,5.486
ESC_L_H: R31.1 U8.38 | length 54.7
  Top layer w0.16: v1(81.001,29.007) 81.001,29.904 R31.1@81.051,29.955
  Top layer w0.2: U8.38@38.944,17.767 38.942,17.769 38.942,20.12 39.853,21.031 50.026,21.031 51.866,22.871 80.571,22.871 80.921,22.521 80.921,21.834 80.874,21.786 v1(80.874,21.819)
  Bottom layer w0.16: v1@80.874,21.746 v1(80.874,21.819) 81.001,21.946 v1(81.001,29.007)
ESC_L_T: R33.1 U8.37 | length 26.6
  Top layer w0.16: R33.1@29.904,32.029 28.579,32.029 28.128,31.578 28.128,28.513 28.513,28.128 31.154,28.128 31.607,27.674 31.607,23.993 32.41,23.19 39.268,23.19 v1(39.421,23.343)
  Top layer w0.2: U8.37@39.444,17.767 39.444,19.225 v1(39.472,19.253)
  Bottom layer w0.16: v1(39.421,23.343) 39.827,22.936 39.827,19.609 v1(39.472,19.253)
ESC_R_H: R32.1 U8.39 | length 75.2
  Top layer w0.2: U8.39@38.444,17.767 38.444,20.816 39.345,21.717 49.657,21.717 v1(49.809,21.565) ; v1(50.013,17.653) 49.889,17.529 49.889,11.225 52.566,8.548 52.578,8.56 v1(52.578,8.611) ; v1(52.705,2.946) 52.902,3.143 66.631,3.143 67.208,2.565 72.974,2.565 74.613,4.204 85.839,4.204 86.94,3.103 R32.1@86.94,-1.536
  Bottom layer w0.2: v1(49.809,21.565) 50.013,21.361 v1(50.013,17.653) ; v1(52.578,8.611) 52.73,8.458 52.73,2.972 v1(52.705,2.946)
ESC_R_T: R34.1 U8.40 | length 39.8
  Top layer w0.2: R34.1@31.666,-7.925 31.666,-6.069 29.591,-3.995 29.591,12.522 29.943,12.874 29.943,14.405 29.238,15.111 29.238,18.24 29.845,18.847 30.912,18.847 34.29,15.469 37.44,15.469 37.948,15.977 37.948,17.763 U8.40@37.944,17.767
FC_RX: P1.1 R2.1 | length 32.1
  Top layer w0.16: 3.454,-5.74 3.454,-7.544 6.096,-10.185 15.265,-10.185 17.272,-8.179 17.272,-4.699 17.983,-3.988 18.702,-3.988 R2.1@18.728,-4.013
  Top layer w0.2: P1.1@1.499,2.743 3.454,0.787 3.454,-5.74
FC_TX: P1.10 R1.1 | length 27
  Top layer w0.2: P1.10@1.499,25.243 3.12,25.243 3.48,25.603 3.48,37.998 4.115,38.633 14.384,38.633 R1.1@15.299,39.548
GND: C1.2 C2.2 C3.1 C4.1 C7.2 C8.2 C9.2 C10.2 C11.2 C12.1 C13.1 C16.2 C17.2 C18.2 C19.2 C20.2 C23.2 C24.1 C25.2 C26.2 C27.2 C28.2 C29.2 C50.2 C51.2 C52.2 C53.2 C54.2 C55.2 C56.2 C57.2 C58.2 C59.2 C62.2 C63.2 C64.2 C65.2 C66.2 C71.2 C72.1 C73.1 C74.1 C75.1 C76.1 C77.2 C78.1 C79.1 C80.1 C81.2 C84.2 C85.2 C86.2 C87.2 D1.1 J1.4 LED1.0 LED2.0 LED3.0 LED4.0 P1.4 P1.5 P1.6 P1.7 P2.0 P2.3 P3.3 P4.3 P5.3 P6.3 P7.2 P8.0 P8.6 P9.0 P9.5 P9.6 P10.0 P10.4 P11.0 P11.9 P11.10 P12.0 P12.2 pad.0 pad.1 pad.2 Q1.2 Q2.2 Q3.2 Q4.2 R4.1 R7.1 R10.1 R13.1 R17.1 R27.1 R28.1 R37.1 R40.1 R43.1 R46.1 R55.2 T2.0 U1.4 U2.4 U3.2 U4.2 U5.2 U8.12 U8.18 U8.31 U8.47 U8.63 U10.1 U10.7 U11.6 U11.7 X2.2 X2.4 | length 4.6
  Top layer w0.3: U8.63@32.094,8.917 v1(33.452,8.915) v1(33.452,8.915) ; U8.12@39.444,6.567 v1(39.444,8.029) ; R40.1@83.845,30.056 83.845,29.718 84.287,29.276 Q2.2@85.083,29.276
  other v1: 32.512,-4.902 34.036,-4.902 35.738,-4.902 28.143,-4.648 26.568,-4.623 20.726,-4.191 21.971,-4.191 15.977,-3.734 32.588,-3.607 16.688,-3.505 36.119,-3.48 102.946,-3.15 103.556,-3.15 94.691,-3.124 93.116,-3.099 30.455,-2.997 66.827,-2.997 87.681,-2.946 42.977,-2.87 73.177,-2.87 85.344,-2.845 89.23,-2.819 59.944,-2.794 80.213,-2.743 46.761,-2.616 55.347,-2.616 51.511,-2.54 39.624,-2.286 95.479,-1.93 88.138,-1.905 93.396,-1.905 99.822,-1.905 97.739,-1.88 91.389,-1.803 24.155,-1.524 18.186,-1.448 21.666,-1.448 26.848,-1.448 42.824,-0.965 51.511,-0.889 55.169,-0.889 66.675,-0.838 36.347,-0.813 46.533,-0.813 59.919,-0.813 85.471,-0.762 38.659,-0.737 73.101,-0.737 80.188,-0.737 30.251,-0.686 101.168,-0.584 20.904,-0.533 19.075,-0.508 93.37,-0.483 97.765,-0.483 22.962,-0.457 95.428,-0.432 91.364,-0.406 99.771,-0.33 15.24,0.178 106.02,0.178 108.255,0.254 102.819,1.346 109.22,1.575 15.596,1.829 39.014,1.829 41.3,1.829 66.573,1.905 73.127,1.93 30.201,2.007 31.928,2.007 80.289,2.007 92.456,2.184 26.822,2.21 36.601,2.286 55.093,2.311 59.919,2.337 13.056,2.388 103.784,2.388 37.414,2.438 89.484,2.464 102.794,2.464 51.435,2.515 42.85,2.54 46.228,2.591 97.511,2.667 85.573,2.743 107.594,2.743 35.027,2.819 15.469,2.997 22.377,3.023 24.46,3.023 14.021,3.048 23.343,3.099 109.525,3.099 99.72,3.175 76.149,3.2 80.289,3.429 111.227,3.658 31.826,3.759 30.226,3.785 23.317,3.861 15.57,3.886 33.807,3.886 11.608,3.988 107.544,4.013 35.001,4.445 89.56,4.47 92.177,4.47 97.536,4.572 99.924,4.597 26.848,4.623 37.211,4.623 32.639,4.674 24.257,4.775 16.383,4.801 15.57,4.826 87.249,4.877 23.571,4.928 13.538,5.004 14.173,5.004 16.942,5.309 11.709,5.486 94.869,5.537 99.593,5.842 26.848,5.918 25.349,6.096 97.231,6.299 89.357,6.426 32.969,6.452 92.177,6.502 80.924,6.528 69.139,6.579 72.695,6.579 77.851,6.604 83.922,6.604 48.692,6.756 22.2,6.782 87.173,6.782 111.354,7.061 22.174,7.569 47.193,7.569 66.192,7.798 25.197,7.849 103.759,7.874 61.011,7.899 61.874,7.95 64.821,8.001 105.613,8.052 37.541,8.28 35.662,8.458 108.204,8.458 26.848,8.788 59.233,8.788 99.974,8.788 57.023,8.839 21.742,8.966 22.454,8.966 38.329,9.195 99.924,9.347 11.709,9.398 97.46,9.398 98.831,9.525 23.774,9.55 22.479,9.576 19.71,9.627 16.942,9.957 105.639,10.058 108.204,10.084 76.022,10.414 78.257,10.49 71.806,10.516 69.723,10.592 20.041,10.617 82.321,10.643 84.226,10.846 87.376,10.846 95.555,10.846 97.46,10.871 92.05,10.897 16.688,11.1 73.584,11.125 18.034,11.151 75.336,11.151 100.99,11.176 71.857,11.227 0.635,11.481 2.642,11.582 75.997,11.684 21.666,11.76 22.657,11.811 110.617,11.887 61.366,11.913 59.08,11.938 108.102,11.938 78.257,12.04 100.203,12.243 105.385,12.319 71.857,12.344 96.317,12.548 73.584,12.573 90.322,12.573 91.542,12.573 55.042,12.649 52.451,12.725 27.381,12.776 26.238,12.827 98.019,12.827 66.878,13.03 99.441,13.487 64.795,13.513 82.296,13.741 84.226,13.767 2.515,13.818 0.66,13.945 78.511,13.945 79.934,13.97 38.633,14.224 26.873,14.402 68.58,14.427 73.279,14.732 74.93,14.732 11.709,14.935 41.021,14.935 52.426,15.062 44.831,15.088 46.203,15.113 99.289,15.215 21.793,15.265 21.184,15.291 22.53,15.291 23.292,15.291 23.952,15.291 102.311,15.316 105.385,15.316 13.36,15.519 103.81,15.57 26.848,15.9 59.512,15.951 66.167,15.951 54.94,15.977 78.511,16.053 69.24,16.129 70.231,16.129 22.479,16.154 71.755,16.18 62.763,16.358 0.838,16.434 2.591,16.434 11.735,16.485 35.179,16.51 36.22,16.51 43.561,16.739 45.949,16.764 16.078,16.815 71.755,16.84 24.079,17.17 16.459,17.196 23.165,17.247 92.354,17.374 89.23,17.551 86.182,17.577 26.899,17.653 11.709,17.755 52.273,17.907 95.86,17.958 69.012,18.059 66.091,18.11 78.461,18.212 20.523,18.263 75.59,18.288 94.005,18.288 74.244,18.313 70.485,18.339 59.741,18.364 23.927,18.466 62.789,18.567 105.359,18.593 33.172,18.644 92.253,19.279 100.381,19.279 32.944,19.38 30.505,19.736 24.562,19.939 22.403,20.015 26.848,20.091 47.117,20.244 45.314,20.269 41.123,20.345 42.799,20.422 86.208,20.447 17.043,20.498 11.709,20.625 23.673,20.752 30.683,20.803 88.976,20.803 99.949,21.336 97.079,21.615 16.891,21.717 92.431,21.793 95.555,21.92 104.953,21.996 26.873,22.123 21.793,22.377 19.761,22.454 15.062,22.504 86.157,22.504 106.401,22.581 25.019,22.631 11.582,23.292 48.285,23.495 96.749,23.52 89.052,23.546 105.41,23.749 15.164,24.028 46.457,24.028 26.848,24.13 35.255,24.13 28.956,24.181 32.893,24.181 38.049,24.282 99.39,24.282 45.364,24.333 79.807,24.511 102.946,24.536 41.402,24.562 81.763,24.638 73.254,24.689 50.419,24.714 62.586,24.765 76.911,24.841 56.972,24.867 52.705,24.917 67.64,25.019 90.094,25.121 87.935,25.146 92.837,25.146 96.698,25.197 43.231,25.603 33.503,25.629 39.167,25.908 40.538,26.01 25.375,26.238 92.685,26.314 28.931,26.34 26.873,26.391 89.84,26.391 45.644,26.416 35.128,26.441 88.24,26.441 36.22,26.467 47.549,26.518 103.048,26.822 81.915,26.873 79.68,26.924 11.709,26.975 18.923,27.051 96.698,27.127 110.998,27.356 18.212,27.483 89.129,27.534 92.812,27.534 109.118,27.534 37.567,27.559 106.782,27.559 39.091,27.61 46.609,27.61 36.246,27.788 14.402,27.889 52.807,28.067 50.597,28.143 57.099,28.143 73.279,28.169 103.073,28.169 67.615,28.194 76.937,28.27 14.376,28.499 40.945,28.499 62.662,28.499 33.452,28.626 16.154,28.702 85.014,28.753 87.147,28.753 31.877,28.778 43.129,28.778 82.398,28.88 47.6,28.956 45.39,28.981 17.628,29.032 30.607,29.058 26.848,29.108 89.205,29.108 91.897,29.134 13.081,29.185 14.427,29.21 21.438,29.261 23.749,29.312 22.53,29.337 25.603,29.337 19.253,29.439 83.769,29.439 36.17,29.515 40.97,29.515 32.106,29.54 37.516,29.54 39.141,29.54 18.567,29.566 33.528,29.591 11.633,29.616 101.067,29.769 85.573,29.794 94.361,29.82 98.12,29.82 99.771,29.82 24.943,29.947 22.53,30.099 20.752,30.709 22.504,30.734 24.892,30.734 32.842,31.369 29.083,31.42 24.155,31.547 26.848,31.547 14.91,31.598 12.7,31.623 17.018,31.623 19.279,31.623 21.869,31.623 34.798,31.699 37.49,31.775 31.801,32.233 37.363,32.588 29.007,32.715 28.321,32.766 34.798,32.766
  other v2: 30.556,-14.681 29.21,-14.63 27.559,-14.605 27.534,-13.411 28.651,-13.36 27.534,-12.268 28.626,-12.243 27.508,-11.201 28.931,-11.024 30.048,-11.024 108.89,-10.516 112.293,-10.516 107.823,-10.465 109.982,-10.439 111.201,-10.439 106.832,-9.855 112.293,-9.601 108.814,-9.576 107.823,-9.449 106.832,-8.915 112.319,-8.687 108.814,-8.661 107.823,-8.56 106.883,-8.026 112.243,-7.823 109.906,-7.747 111.074,-7.747 108.788,-7.722 107.798,-7.645 13.208,10.795 13.183,11.735 13.157,12.675 13.157,13.589 108.102,35.839 108.991,35.992 112.319,36.068 107.061,36.525 108.128,36.805 108.991,36.855 112.293,37.211 107.061,37.516 108.102,37.668 108.991,37.719 107.061,38.43 112.166,38.43 108.077,38.557 108.991,38.557 29.413,38.862 30.683,38.862 28.727,39.751 28.702,40.716 27.788,40.742 28.727,41.681 27.762,41.707 27.788,42.748 29.769,42.748 28.854,42.774 30.734,42.774
GPS_RX: P10.3 R52.2 | length 79.1
  Top layer w0.16: R52.2@37.363,20.972 37.363,21.539 37.901,22.077 50.549,22.077 51.703,23.231 80.911,23.231 81.384,22.758 81.384,16.492 81.839,16.037 96.354,16.037 98.79,18.474 98.79,25.121 99.334,25.664 P10.3@100.702,25.664
GPS_TX: P10.2 R51.2 | length 81.2
  Top layer w0.16: R51.2@36.449,20.972 36.449,21.844 37.022,22.417 50.408,22.417 51.562,23.571 81.077,23.571 81.724,22.924 81.724,16.993 82.339,16.377 96.213,16.377 98.45,18.615 98.45,26.391 98.974,26.914 P10.2@100.702,26.914
LED_L_H: R39.1 U8.35 | length 53.1
  Top layer w0.16: U8.35@40.444,17.767 40.444,18.801 40.972,19.329 48.86,19.329 52.015,22.484 80.208,22.484 v1(80.391,22.301) ; v1(80.366,28.651) 80.536,28.481 81.331,28.481 81.712,28.862 81.712,29.794 81.974,30.056 R39.1@82.88,30.056
  Bottom layer w0.16: v1(80.366,28.651) 80.366,28.778 80.543,28.6 80.543,22.454 v1(80.391,22.301)
LED_L_T: R36.1 U8.36 | length 37.1
  Top layer w0.16: R36.1@33.655,32.241 33.655,31.165 33.96,30.86 47.448,30.86 48.311,29.997 v1(48.311,25.121) ; U8.36@39.944,17.767 39.982,17.805 39.982,19.204 40.462,19.685 48.387,19.685 v1(48.946,20.244)
  Bottom layer w0.16: v1(48.311,25.121) 48.946,24.486 v1(48.946,20.244)
LED_R_H: R44.1 U8.9 | length 57.6
  Top layer w0.16: U8.9@37.944,6.567 37.944,5.793 40.019,3.718 50.571,3.718 50.786,3.503 66.655,3.503 67.716,4.564 86.165,4.564 87.3,3.429 87.3,-0.457 87.782,-0.94 R44.1@88.857,-0.94
LED_R_T: R42.1 U8.8 | length 42.8
  Top layer w0.16: R42.1@18.534,-13.716 22.936,-13.716 27,-9.652 28.397,-9.652 28.981,-9.068 28.981,-5.029 29.261,-4.75 v1(29.286,-4.75) ; v1(31.369,-4.597) 31.699,-4.267 41.097,-4.267 41.91,-3.454 41.91,2.997 41.529,3.378 39.877,3.378 37.444,5.812 U8.8@37.444,6.567
  Bottom layer w0.16: v1(29.286,-4.75) 31.217,-4.75 v1(31.369,-4.597)
NetC3_2: C3.2 R4.2 U1.1 | length 3.5
  Top layer w0.3: U1.1@17.063,7.909 17.063,8.706 17.577,9.22 ; 17.5,9.22 17.577,9.22 ; R4.2@18.042,10.185 C3.2@18.042,9.22 ; 17.577,9.22 C3.2@18.042,9.22 ; 17.577,9.22 C3.2@18.042,9.22
NetC4_2: C4.2 U1.7 | length 1.3
  Top layer w0.3: U1.7@19.463,7.259 20.688,7.259 C4.2@20.709,7.239
NetC5_1: C5.1 L1.1 U1.3
NetC5_2: C5.2 R5.2 | length 1.5
  Top layer w0.3: C5.2@19.322,4.852 20.592,4.852 R5.2@20.726,4.986
NetC6_2: C6.2 R6.2 R7.2 R8.1 | length 3.2
  Top layer w0.3: R6.2@21.701,8.23 R8.1@22.665,8.23 ; R7.2@22.86,5.986 22.868,5.994 R8.1@22.868,8.23
NetC12_2: C12.2 U2.7 | length 1.4
  Top layer w0.3: U2.7@18.675,18.918 19.51,18.918 C12.2@19.913,19.322
NetC13_2: C13.2 R10.2 U2.1 | length 2.4
  Top layer w0.3: C13.2@15.08,21.285 15.08,20.396 R10.2@15.105,20.371 15.908,19.568 U2.1@16.275,19.568
NetC14_1: C14.1 L2.1 U2.3
NetC14_2: C14.2 R11.2 | length 1.4
  Top layer w0.3: C14.2@18.509,16.51 19.871,16.51 R11.2@19.914,16.467
NetC15_2: C15.2 R12.2 R13.2 R14.1 | length 2.7
  Top layer w0.3: R13.2@21.217,17.374 21.234,17.391 R12.2@21.234,18.321 R14.1@22.987,18.321
NetC21_1: C21.1 U3.1 | length 1.9
  Top layer w0.3: U3.1@18.832,28.302 19.99,27.143 C21.1@19.99,26.84
NetC21_2: C21.2 D1.2 L3.1 U3.6 | length 1.2
  Top layer w0.5: U3.6@18.832,25.902 18.894,25.84 C21.2@19.99,25.84
NetC22_1: C22.1 R16.1 R17.2 U3.3 | length 3.8
  Top layer w0.3: R16.1@15.265,29.421 15.283,29.439 R17.2@16.899,29.439 ; C22.1@15.951,29.447 16.899,29.447 R17.2@16.899,29.439 ; R17.2@16.924,29.439 R17.2@16.899,29.439 ; U3.3@16.932,28.302 16.932,29.159 ; 16.932,29.185 16.932,29.159 ; R17.2@16.899,29.439 16.899,29.192 16.932,29.159
NetC74_2: C74.2 U11.11 | length 1.4
  Top layer w0.16: U11.11@72.556,15.271 C74.2@73.973,15.271
NetC83_1: C83.1 R9.2 R21.1 R22.2 | length 2.8
  Top layer w0.2: R22.2@18.94,21.666 20.812,21.666 C83.1@20.828,21.65 R21.1@21.767,21.65
NetC83_2: C83.2 R55.1 | length 1
  Top layer w0.22: C83.2@20.828,20.65 R55.1@21.793,20.65
NetJ1_2: J1.2 R19.2 | length 49
  Top layer w0.16: J1.2@11.649,-5.35 13.268,-5.35 15.745,-2.873 27.583,-2.873 28.538,-1.919 28.538,20.638 29.728,21.828 35.245,21.828 35.535,21.539 R19.2@35.535,20.972
NetJ1_3: J1.3 R18.2 R20.2 | length 51.2
  Top layer w0.16: J1.3@13.649,-7.35 16.602,-7.35 16.912,-7.04 16.912,-4.242 17.94,-3.213 27.724,-3.213 28.878,-2.059 28.878,20.293 30.074,21.488 34.493,21.488 34.595,21.387 R20.2@34.595,20.972
  Top layer w0.5: R18.2@11.828,-8.941 13.233,-8.941 13.649,-8.525 J1.3@13.649,-7.35
NetLED1_1: LED1.1 R35.2 | length 4.3
  Top layer w0.5: LED1.1@23.226,35.305 23.226,34.407 23.698,33.934 25.527,33.934 25.873,34.281 R35.2@25.873,34.696
NetLED2_1: LED2.1 R38.2 | length 10
  Top layer w0.4: R38.2@92.465,31.42 92.465,32.725 93.09,33.349 LED2.1@100.95,33.349
NetLED3_1: LED3.1 R41.2 | length 8.2
  Top layer w0.5: R41.2@18.44,-5.883 18.466,-5.858 v1(18.466,-5.08) ; LED3.1@24.476,-5.18 24.97,-5.18 v1(25.121,-5.029)
  Bottom layer w0.5: v1(18.466,-5.08) 25.07,-5.08 v1(25.121,-5.029)
NetLED4_1: LED4.1 R45.2 | length 10
  Top layer w0.4: R45.2@94.802,-5.207 94.802,-4.207 95.352,-3.658 101.676,-3.658 102.225,-4.206 LED4.1@102.225,-5.282
NetP2_1: P2.1 R30.2 | length 3.3
  Top layer w0.16: R30.2@106.959,8.085 106.959,6.96 107.437,6.482 P2.1@108.983,6.482
NetP3_2: P3.2 R31.2 | length 38.6
  Top layer w0.16: v1(100.305,29.159) 104.775,29.159 105.131,29.515 105.131,34.265 105.613,34.747 109.807,34.747 P3.2@110.566,33.988
  Top layer w0.2: R31.2@81.051,30.955 81.051,31.598 81.585,32.131 85.801,32.131 86.182,31.75 86.182,29.769 86.563,29.388 88.29,29.388 88.697,29.794 93.396,29.794 94.082,29.108 v1(97.968,29.108)
  Bottom layer w0.2: v1(97.968,29.108) 100.254,29.108 v1(100.305,29.159)
NetP4_2: P4.2 R32.2 | length 28.7
  Top layer w0.2: R32.2@86.919,-2.557 86.919,-3.607 87.427,-4.115 91.084,-4.115 92.634,-2.565 103.81,-2.565 104.699,-3.454 104.699,-5.766 105.41,-6.477 110.036,-6.477 P4.2@110.541,-5.972
NetP5_2: P5.2 R33.2 | length 10.1
  Top layer w0.2: R33.2@30.904,32.029 30.429,32.504 30.429,35.535 31.496,36.601 31.496,38.43 32.941,39.875 P5.2@32.941,40.869
NetP6_2: P6.2 R34.2 | length 5.8
  Top layer w0.2: R34.2@30.666,-7.925 30.666,-7.984 31.377,-8.695 31.377,-11.184 32.944,-12.751 P6.2@32.966,-12.751